# Altium PCB nguon.PcbDoc
Units mm, origin at the board's own origin, x right, y up, seen from the top; angles counter-clockwise.
Board outline 36.58 x 27.56 mm, 2 copper layers (Top Layer, Bottom Layer); 54 components, 5 nets, 132 pads, 24 vias.
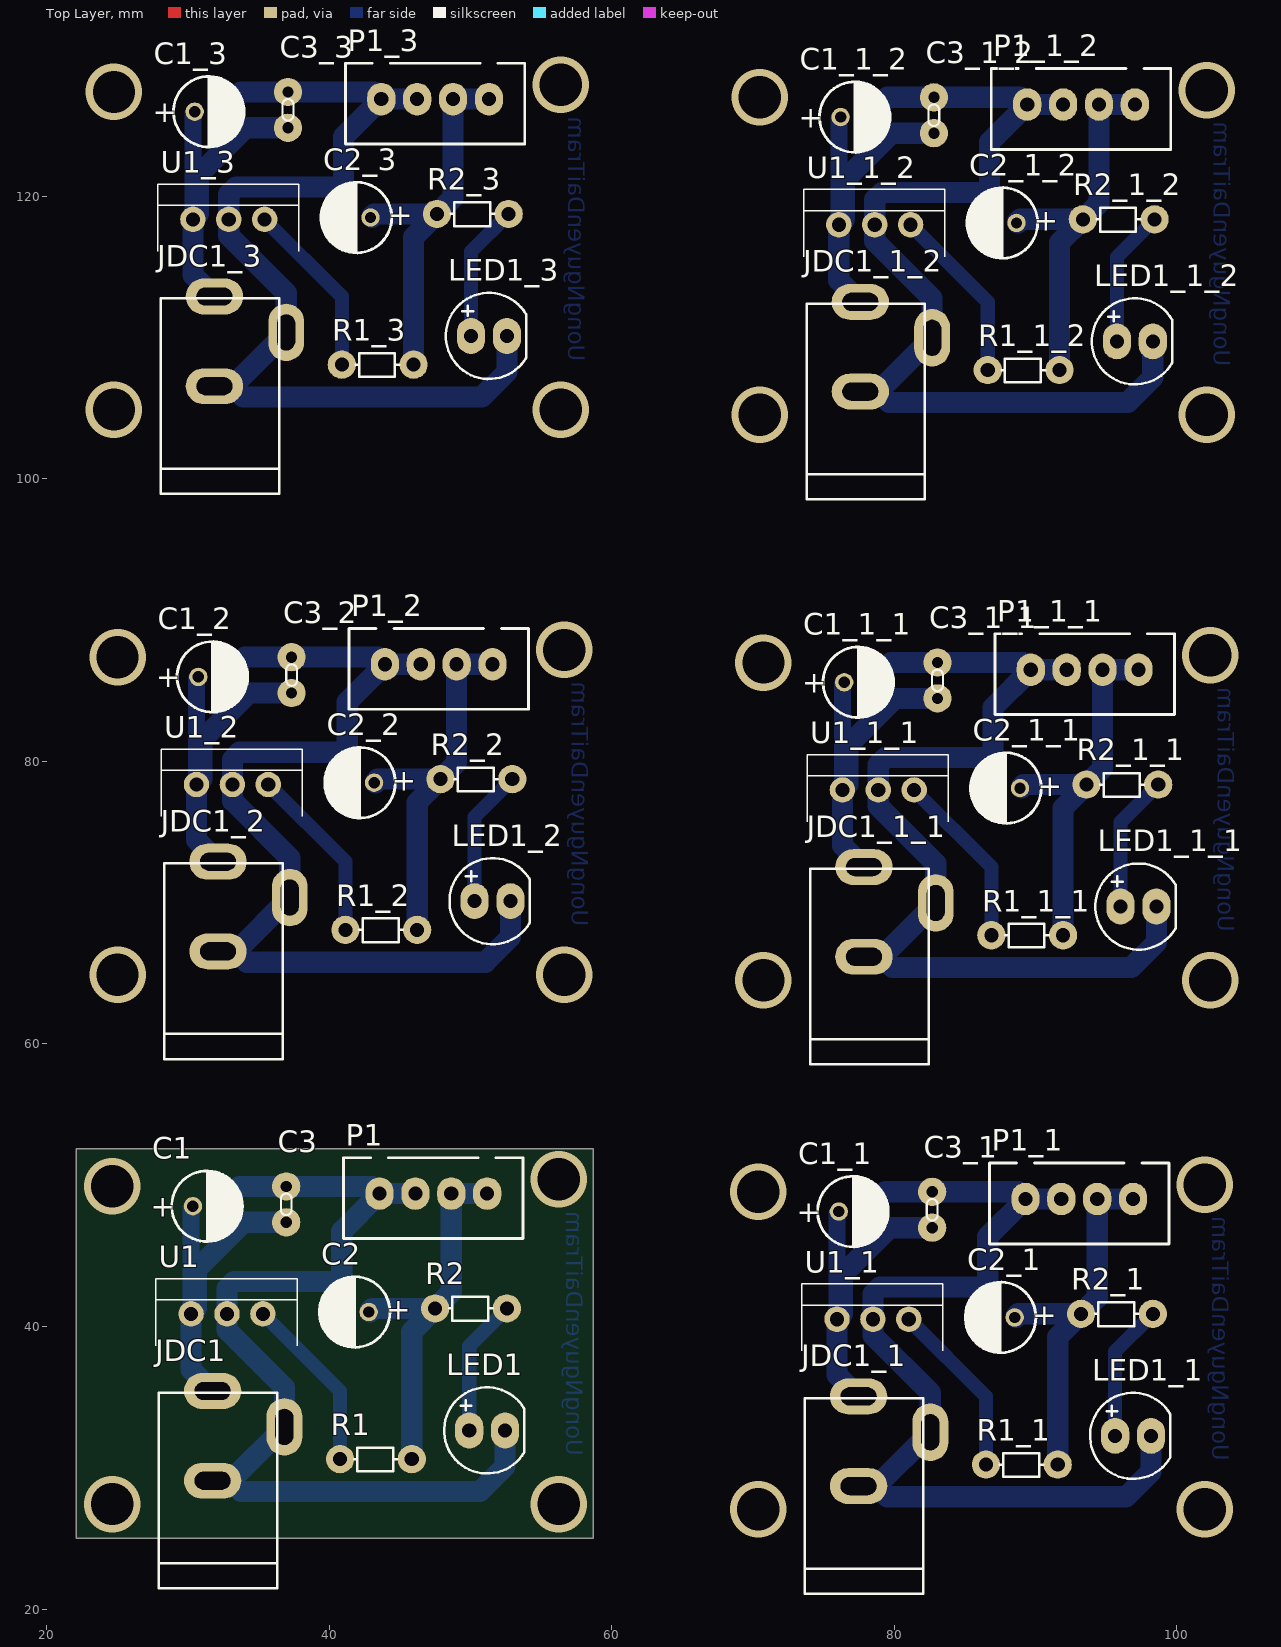
[diagram p0: Top Layer view]
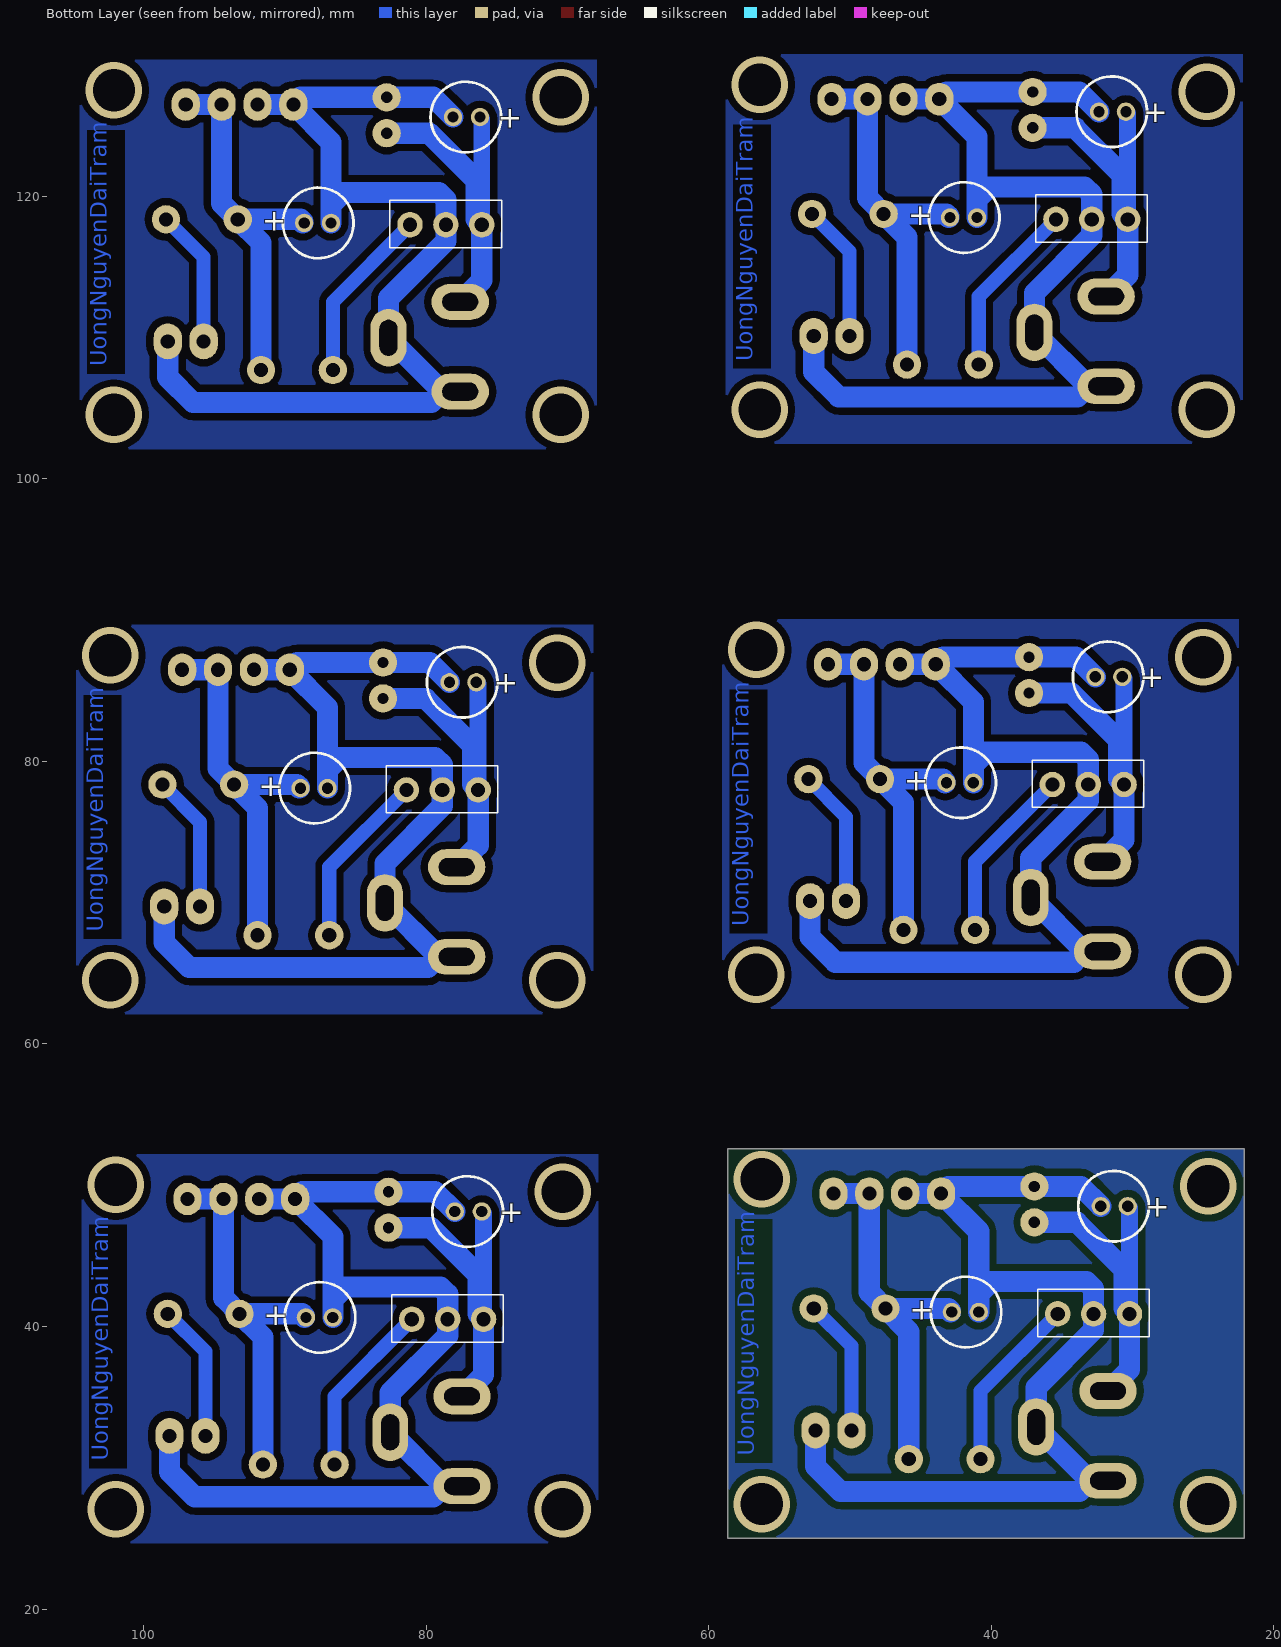
[diagram p1: Bottom Layer view, seen from below]

## Layer stack, top to bottom
Top Solder: solder mask 0.0102, Solder Resist, Dk 3.5
Top Layer: signal copper 0.0356
Dielectric 1: dielectric 0.32, FR-4, Dk 4.8
Bottom Layer: signal copper 0.0356
Bottom Solder: solder mask 0.0102, Solder Resist, Dk 3.5

## Board outline
22.098,25.019 22.098,52.578 58.674,52.578 58.674,25.019

## Design rules (kind name [scope] priority, off if disabled: settings)
Clearance [All] p1: gap=0.5 ignorepadtopadclearanceinfootprint=FALSE
PolygonConnect [All] p1: connectstyle=Relief reliefconductorwidth=0.254 reliefentries=4 polygonreliefangle="90 Angle" airgapwidth=0.254
RoutingVias [All] p1: holewidth=0.711 width=1.27 viastyle="Through Hole" minholewidth=0.711 minwidth=1.27 maxholewidth=0.711 maxwidth=1.27
SolderMaskExpansion [All] p1: expansion=0.102
Width [All] p1: maxlimit=1.5 minlimit=1 preferedwidth=1.2
30 further rules are at their usual default settings.

## Classes and differential pairs
component class nguon: C1 C2 C3 JDC1 LED1 P1 R1 R2 U1

## Components (designator, comment, footprint, x,y, rotation, side; value= is the part's Value field where it differs from the comment)
C1 "100uF" "RADIAL B" 30.353,48.514 r0 top
C1_1 "100uF" "RADIAL B" 76.073,48.133 r0 top (schematic designator C1)
C1_1_1 "100uF" "RADIAL B" 76.454,85.598 r0 top (schematic designator C1)
C1_1_2 "100uF" "RADIAL B" 76.2,125.603 r0 top (schematic designator C1)
C1_2 "100uF" "RADIAL B" 30.734,85.979 r0 top (schematic designator C1)
C1_3 "100uF" "RADIAL B" 30.48,125.984 r0 top (schematic designator C1)
C2 "100uF" "RADIAL B" 42.799,41.021 r180 top
C2_1 "100uF" "RADIAL B" 88.519,40.64 r180 top (schematic designator C2)
C2_1_1 "100uF" "RADIAL B" 88.9,78.105 r180 top (schematic designator C2)
C2_1_2 "100uF" "RADIAL B" 88.646,118.11 r180 top (schematic designator C2)
C2_2 "100uF" "RADIAL B" 43.18,78.486 r180 top (schematic designator C2)
C2_3 "100uF" "RADIAL B" 42.926,118.491 r180 top (schematic designator C2)
C3 "Capacitor Ceramic" Tu-pico 36.957,49.911 r270 top value=104
C3_1 "Capacitor Ceramic" Tu-pico 82.677,49.53 r270 top value=104 (schematic designator C3)
C3_1_1 "Capacitor Ceramic" Tu-pico 83.058,86.995 r270 top value=104 (schematic designator C3)
C3_1_2 "Capacitor Ceramic" Tu-pico 82.804,127 r270 top value=104 (schematic designator C3)
C3_2 "Capacitor Ceramic" Tu-pico 37.338,87.376 r270 top value=104 (schematic designator C3)
C3_3 "Capacitor Ceramic" Tu-pico 37.084,127.381 r270 top value=104 (schematic designator C3)
JDC1 "Jac DC" DC0 34.29,32.258 r90 top
JDC1_1 "Jac DC" DC0 80.01,31.877 r90 top (schematic designator JDC1)
JDC1_1_1 "Jac DC" DC0 80.391,69.342 r90 top (schematic designator JDC1)
JDC1_1_2 "Jac DC" DC0 80.137,109.347 r90 top (schematic designator JDC1)
JDC1_2 "Jac DC" DC0 34.671,69.723 r90 top (schematic designator JDC1)
JDC1_3 "Jac DC" DC0 34.417,109.728 r90 top (schematic designator JDC1)
LED1 "LED" LED-5-RED 49.911,32.639 r0 top value="LED 3 ly Single Colour"
LED1_1 "LED" LED-5-RED 95.631,32.258 r0 top value="LED 3 ly Single Colour" (schematic designator LED1)
LED1_1_1 "LED" LED-5-RED 96.012,69.723 r0 top value="LED 3 ly Single Colour" (schematic designator LED1)
LED1_1_2 "LED" LED-5-RED 95.758,109.728 r0 top value="LED 3 ly Single Colour" (schematic designator LED1)
LED1_2 "LED" LED-5-RED 50.292,70.104 r0 top value="LED 3 ly Single Colour" (schematic designator LED1)
LED1_3 "LED" LED-5-RED 50.038,110.109 r0 top value="LED 3 ly Single Colour" (schematic designator LED1)
P1 "Connector" JST-XH_B4B-XH-A 47.371,49.403 r180 top
P1_1 "Connector" JST-XH_B4B-XH-A 93.091,49.022 r180 top (schematic designator P1)
P1_1_1 "Connector" JST-XH_B4B-XH-A 93.472,86.487 r180 top (schematic designator P1)
P1_1_2 "Connector" JST-XH_B4B-XH-A 93.218,126.492 r180 top (schematic designator P1)
P1_2 "Connector" JST-XH_B4B-XH-A 47.752,86.868 r180 top (schematic designator P1)
P1_3 "Connector" JST-XH_B4B-XH-A 47.498,126.873 r180 top (schematic designator P1)
R1 "CT" R1/8W 43.307,30.607 r180 top value="R1/4W - 1K"
R1_1 "CT" R1/8W 89.027,30.226 r180 top value="R1/4W - 1K" (schematic designator R1)
R1_1_1 "CT" R1/8W 89.408,67.691 r180 top value="R1/4W - 1K" (schematic designator R1)
R1_1_2 "CT" R1/8W 89.154,107.696 r180 top value="R1/4W - 1K" (schematic designator R1)
R1_2 "CT" R1/8W 43.688,68.072 r180 top value="R1/4W - 1K" (schematic designator R1)
R1_3 "CT" R1/8W 43.434,108.077 r180 top value="R1/4W - 1K" (schematic designator R1)
R2 "220" R1/8W 50.038,41.275 r180 top value="R1/4W - 1K"
R2_1 "220" R1/8W 95.758,40.894 r180 top value="R1/4W - 1K" (schematic designator R2)
R2_1_1 "220" R1/8W 96.139,78.359 r180 top value="R1/4W - 1K" (schematic designator R2)
R2_1_2 "220" R1/8W 95.885,118.364 r180 top value="R1/4W - 1K" (schematic designator R2)
R2_2 "220" R1/8W 50.419,78.74 r180 top value="R1/4W - 1K" (schematic designator R2)
R2_3 "220" R1/8W 50.165,118.745 r180 top value="R1/4W - 1K" (schematic designator R2)
U1 "LM78xx" TO-220 30.226,40.894 r270 top value=LM7805CT
U1_1 "LM78xx" TO-220 75.946,40.513 r270 top value=LM7805CT (schematic designator U1)
U1_1_1 "LM78xx" TO-220 76.327,77.978 r270 top value=LM7805CT (schematic designator U1)
U1_1_2 "LM78xx" TO-220 76.073,117.983 r270 top value=LM7805CT (schematic designator U1)
U1_2 "LM78xx" TO-220 30.607,78.359 r270 top value=LM7805CT (schematic designator U1)
U1_3 "LM78xx" TO-220 30.353,118.364 r270 top value=LM7805CT (schematic designator U1)

## Footprints (in the part's own frame and the unit in brackets; to place one, negate y for a bottom-side part, rotate by r counter-clockwise, add the part's x,y. Pads: shape width x height; smd on the part's side, far side on the other; paste and mask are expansions set on the pad)
DC0 [mil] "Jac DC input"
  oval 100x160 hole 50 slot 100 at 90 deg: 1(125,100) 2(-125,100)
  oval 160x100 hole 50 slot 100 at 0 deg: 3(25,-100)
  silkscreen extent -425,-80 120,250, body extent -410,-105 134,269, height 434
JST-XH_B4B-XH-A [mm] "JST; XH series; 4 circuit; 2.54 Pitch; Through-hole type; Top entry"
  oval 2x2.3 hole 1: 1(-3.81,0) 2(-1.27,0) 3(1.27,0) 4(3.81,0)
  silkscreen extent -6.35,-2.54 6.35,3.18, body extent -6.2,-2.57 6.2,3.18, height 7
LED-5-RED [mm] "LED 2 PIN, 5 ly , Only colour,pin to pin 100mil"
  oval 2x2.54 hole 1: 1(0,0) 2(2.54,0)
  silkscreen extent -1.77,-3.05 3.91,3.04, body extent -1.64,-3.02 3.78,3, height 8.62
R1/8W [mm] "R 1/8W, 2 pin, 300mil"
  round 2 hole 1: 1(-2.54,0) 2(2.54,0)
  silkscreen extent -1.52,-0.81 1.55,0.86, body extent -3.43,-0.9 3.43,0.94, height 2.19
"RADIAL B" [mm] "Capacitor, Electrolytic, Radial; Body 5 x 6.8 mm (Dia.xH typ); Pin Spacing 2 mm (typ)"
  round 1.3 hole 0.8: 1(0,0) 2(1.905,0)
  silkscreen extent -1.5,-2.5 3.5,2.51, body extent -1.48,-2.49 3.52,2.51, height 11
TO-220 [mm]
  round 1.8 hole 1: 1(0,0) 2(0,2.54) 3(0,5.08)
  silkscreen extent -2.5,-2.5 2.25,7.5, body extent -2.4,-2.45 2.1,7.45, height 19.7
Tu-pico [mm] "Tu gom mini"
  round 2 hole 0.8: 1(0,0) 2(2.54,0)
  silkscreen extent 0.51,-0.38 2.03,0.38, body extent -1.65,-0.85 4.19,0.85, height 6.12

## Part data
C1 C1_1 C1_1_1 C1_1_2 C1_2 C1_3 C2 C2_1 C2_1_1 C2_1_2 C2_2 C2_3: library part Cap_Pol, "Polarized Capacitor", Capacitor Type=Tant, Manufacturer=FARNELL, Volt=25V, AEMS Code=2100110, ComponentLink1Description="Digikey Part Link", ComponentLink2Description="Open Datasheet", ComponentLink2URL=H:\LIBRARY\LIBRARY.Datasheet\, Published=13-April-2009, Publisher="Hoang Nguyen", Vendor=Digikey
C3 C3_1 C3_1_1 C3_1_2 C3_2 C3_3: library part CapCeramic, "Capacitor", LatestRevisionDate=17-Jul-2002, LatestRevisionNote="Re-released for DXP Platform.", PackageReference=RAD-0.3, Published=8-Jun-2000, Publisher="Altium Limited"
JDC1 JDC1_1 JDC1_1_1 JDC1_1_2 JDC1_2 JDC1_3: library part DCIN, "Jac DC input"
LED1 LED1_1 LED1_1_1 LED1_1_2 LED1_2 LED1_3: "LED Single colour Green and Red"
P1 P1_1 P1_1_1 P1_1_2 P1_2 P1_3: library part Connector_4pin
R1 R1_1 R1_1_1 R1_1_2 R1_2 R1_3 R2 R2_1 R2_1_1 R2_1_2 R2_2 R2_3: library part R, "Resistor 1/4W"
U1 U1_1 U1_1_1 U1_1_2 U1_2 U1_3: library part 78xx, "Regulator", Manufacturer="Fairchild Semiconductor Corporation", Output Current="Up to 1A", PSpiceTemplate="X^@REFDES %IN %OUT %GND @MODEL", Tolerance="4 %", ComponentLink1Description="Digikey Part Link", ComponentLink2Description="Open Datasheet", ComponentLink2URL=H:\LIBRARY\LIBRARY.Datasheet\LM7805.pdf, Price="2500 VND", Published=13-April-2009, Publisher="Hoang Nguyen", Vendor=Digikey, V out=5V

## Via types
v1: diameter 4, hole 3, Top Layer to Bottom Layer, 24 vias

## Nets (pads, with @x,y where several pads share a name; then routed paths per layer and width w, separated by ;. In a path a pad name is that pad's centre, name@x,y a point inside that pad or via, vN(x,y) a via of type N, cw(c..) or ccw(c..) an arc to the next point about the centre after c; other vN are vias at no path point)
5V: C2.1 P1.1 P1.2 R1.1 R2.2 | length 27.3
  Bottom Layer w1.5: C2.1@42.894,41.021 42.894,41.116 43.053,41.275 R2.2 ; R1.1 45.847,39.624 R2.2 ; P1.1 P1.2 48.641,42.418 R2.2
12V: C1.1 C3.2 JDC1.1 U1.1 | length 24.8
  Bottom Layer w1.2: U1.1 30.226,48.387 C1.1
  Bottom Layer w1.5: JDC1.1 30.226,36.957 U1.1 30.616,41.284 30.616,44.044 33.943,47.371 C3.2
GND: C1.2 C2.2 C3.1 JDC1.2 JDC1.3 LED1.2 P1.3 P1.4 U1.2 | length 74
  Bottom Layer w1.5: JDC1.2 JDC1.2@33.02,29.083 ; C1.2 33.655,49.911 C3.1 43.053,49.911 P1.4 ; C2.2 40.894,42.291 ; P1.3 P1.4 ; LED1.2 52.451,30.099 50.673,28.321 33.782,28.321 JDC1.2@33.02,29.083 ; JDC1.2@33.02,29.083 JDC1.3 36.83,35.687 32.766,39.751 U1.2 32.766,42.672 33.274,43.18 40.005,43.18 40.894,42.291 ; 40.894,42.291 40.894,46.736 P1.4
NetLED1_1: LED1.1 R2.1 | length 9.7
  Bottom Layer w1: LED1.1 49.911,38.608 R2.1
NetR1_2: R1.2 U1.3 | length 12.5
  Bottom Layer w1: U1.3 40.767,35.433 R1.2
pads on no net: C1_1.1 C1_1.2 C1_1_1.1 C1_1_1.2 C1_1_2.1 C1_1_2.2 C1_2.1 C1_2.2 C1_3.1 C1_3.2 C2_1.1 C2_1.2 C2_1_1.1 C2_1_1.2 C2_1_2.1 C2_1_2.2 C2_2.1 C2_2.2 C2_3.1 C2_3.2 C3_1.1 C3_1.2 C3_1_1.1 C3_1_1.2 C3_1_2.1 C3_1_2.2 C3_2.1 C3_2.2 C3_3.1 C3_3.2 JDC1_1.1 JDC1_1.2 JDC1_1.3 JDC1_1_1.1 JDC1_1_1.2 JDC1_1_1.3 JDC1_1_2.1 JDC1_1_2.2 JDC1_1_2.3 JDC1_2.1 JDC1_2.2 JDC1_2.3 JDC1_3.1 JDC1_3.2 JDC1_3.3 LED1_1.1 LED1_1.2 LED1_1_1.1 LED1_1_1.2 LED1_1_2.1 LED1_1_2.2 LED1_2.1 LED1_2.2 LED1_3.1 LED1_3.2 P1_1.1 P1_1.2 P1_1.3 P1_1.4 P1_1_1.1 P1_1_1.2 P1_1_1.3 P1_1_1.4 P1_1_2.1 P1_1_2.2 P1_1_2.3 P1_1_2.4 P1_2.1 P1_2.2 P1_2.3 P1_2.4 P1_3.1 P1_3.2 P1_3.3 P1_3.4 R1_1.1 R1_1.2 R1_1_1.1 R1_1_1.2 R1_1_2.1 R1_1_2.2 R1_2.1 R1_2.2 R1_3.1 R1_3.2 R2_1.1 R2_1.2 R2_1_1.1 R2_1_1.2 R2_1_2.1 R2_1_2.2 R2_2.1 R2_2.2 R2_3.1 R2_3.2 U1_1.1 U1_1.2 U1_1.3 U1_1_1.1 U1_1_1.2 U1_1_1.3 U1_1_2.1 U1_1_2.2 U1_1_2.3 U1_2.1 U1_2.2 U1_2.3 U1_3.1 U1_3.2 U1_3.3
copper on no net: | length 741.6
  Bottom Layer w1: 35.433,118.364 40.894,112.903 40.894,108.077 ; 35.687,78.359 41.148,72.898 41.148,68.072 ; 50.038,110.109 50.038,116.078 52.705,118.745 ; 50.292,70.104 50.292,76.073 52.959,78.74 ; 81.026,40.513 86.487,35.052 86.487,30.226 ; 81.153,117.983 86.614,112.522 86.614,107.696 ; 81.407,77.978 86.868,72.517 86.868,67.691 ; 95.631,32.258 95.631,38.227 98.298,40.894 ; 95.758,109.728 95.758,115.697 98.425,118.364 ; 96.012,69.723 96.012,75.692 98.679,78.359
  Bottom Layer w1.2: 30.353,118.364 30.353,125.857 30.48,125.984 ; 30.607,78.359 30.607,85.852 30.734,85.979 ; 75.946,40.513 75.946,48.006 76.073,48.133 ; 76.073,117.983 76.073,125.476 76.2,125.603 ; 76.327,77.978 76.327,85.471 76.454,85.598
  Bottom Layer w1.5: 31.877,106.553 33.147,106.553 ; 31.877,112.903 30.353,114.427 30.353,118.364 30.743,118.754 30.743,121.514 34.07,124.841 37.084,124.841 ; 32.131,66.548 33.401,66.548 ; 32.131,72.898 30.607,74.422 30.607,78.359 30.997,78.749 30.997,81.509 34.324,84.836 37.338,84.836 ; 32.385,125.984 33.782,127.381 37.084,127.381 43.18,127.381 43.688,126.873 ; 32.639,85.979 34.036,87.376 37.338,87.376 43.434,87.376 43.942,86.868 ; 41.021,118.491 41.021,119.761 ; 41.275,78.486 41.275,79.756 ; 43.021,118.491 43.021,118.586 43.18,118.745 47.625,118.745 ; 43.275,78.486 43.275,78.581 43.434,78.74 47.879,78.74 ; 45.974,108.077 45.974,117.094 47.625,118.745 ; 46.228,68.072 46.228,77.089 47.879,78.74 ; 46.228,126.873 43.688,126.873 ; 46.482,86.868 43.942,86.868 ; 51.308,126.873 48.768,126.873 48.768,119.888 47.625,118.745 ; 51.562,86.868 49.022,86.868 49.022,79.883 47.879,78.74 ; 52.578,110.109 52.578,107.569 50.8,105.791 33.909,105.791 33.147,106.553 ; 52.832,70.104 52.832,67.564 51.054,65.786 34.163,65.786 33.401,66.548 ; 77.47,28.702 78.74,28.702 ; 77.47,35.052 75.946,36.576 75.946,40.513 76.336,40.903 76.336,43.663 79.663,46.99 82.677,46.99 ; 77.597,106.172 78.867,106.172 ; 77.597,112.522 76.073,114.046 76.073,117.983 76.463,118.373 76.463,121.133 79.79,124.46 82.804,124.46 ; 77.851,66.167 79.121,66.167 ; 77.851,72.517 76.327,74.041 76.327,77.978 76.717,78.368 76.717,81.128 80.044,84.455 83.058,84.455 ; 77.978,48.133 79.375,49.53 82.677,49.53 88.773,49.53 89.281,49.022 ; 78.105,125.603 79.502,127 82.804,127 88.9,127 89.408,126.492 ; 78.359,85.598 79.756,86.995 83.058,86.995 89.154,86.995 89.662,86.487 ; 86.614,40.64 86.614,41.91 ; 86.741,118.11 86.741,119.38 ; 86.995,78.105 86.995,79.375 ; 88.614,40.64 88.614,40.735 88.773,40.894 93.218,40.894 ; 88.741,118.11 88.741,118.205 88.9,118.364 93.345,118.364 ; 88.995,78.105 88.995,78.2 89.154,78.359 93.599,78.359 ; 91.567,30.226 91.567,39.243 93.218,40.894 ; 91.694,107.696 91.694,116.713 93.345,118.364 ; 91.821,49.022 89.281,49.022 ; 91.948,67.691 91.948,76.708 93.599,78.359 ; 91.948,126.492 89.408,126.492 ; 92.202,86.487 89.662,86.487 ; 96.901,49.022 94.361,49.022 94.361,42.037 93.218,40.894 ; 97.028,126.492 94.488,126.492 94.488,119.507 93.345,118.364 ; 97.282,86.487 94.742,86.487 94.742,79.502 93.599,78.359 ; 98.171,32.258 98.171,29.718 96.393,27.94 79.502,27.94 78.74,28.702 ; 98.298,109.728 98.298,107.188 96.52,105.41 79.629,105.41 78.867,106.172 ; 98.552,69.723 98.552,67.183 96.774,65.405 79.883,65.405 79.121,66.167 ; 33.147,106.553 36.957,110.363 36.957,113.157 32.893,117.221 32.893,118.364 32.893,120.142 33.401,120.65 40.132,120.65 41.021,119.761 ; 33.401,66.548 37.211,70.358 37.211,73.152 33.147,77.216 33.147,78.359 33.147,80.137 33.655,80.645 40.386,80.645 41.275,79.756 ; 41.021,119.761 41.021,124.206 43.688,126.873 ; 41.275,79.756 41.275,84.201 43.942,86.868 ; 78.74,28.702 82.55,32.512 82.55,35.306 78.486,39.37 78.486,40.513 78.486,42.291 78.994,42.799 85.725,42.799 86.614,41.91 ; 78.867,106.172 82.677,109.982 82.677,112.776 78.613,116.84 78.613,117.983 78.613,119.761 79.121,120.269 85.852,120.269 86.741,119.38 ; 79.121,66.167 82.931,69.977 82.931,72.771 78.867,76.835 78.867,77.978 78.867,79.756 79.375,80.264 86.106,80.264 86.995,79.375 ; 86.614,41.91 86.614,46.355 89.281,49.022 ; 86.741,119.38 86.741,123.825 89.408,126.492 ; 86.995,79.375 86.995,83.82 89.662,86.487
  other v1: 70.358,27.051 101.981,27.051 24.638,27.432 56.261,27.432 70.358,49.53 24.638,49.911 101.981,50.038 56.261,50.419 70.739,64.516 102.362,64.516 25.019,64.897 56.642,64.897 70.739,86.995 25.019,87.376 102.362,87.503 56.642,87.884 70.485,104.521 102.108,104.521 24.765,104.902 56.388,104.902 70.485,127 24.765,127.381 102.108,127.508 56.388,127.889

## Polygon pours and split planes (outlines as drawn)
no net on Bottom Layer (solid, pour order 14): 22.225,102.489 22.225,130.048 58.801,130.048 58.801,102.489
no net on Bottom Layer (solid, pour order 12): 67.945,102.108 67.945,129.667 104.521,129.667 104.521,102.108
no net on Bottom Layer (solid, pour order 10): 22.479,62.484 22.479,90.043 59.055,90.043 59.055,62.484
no net on Bottom Layer (solid, pour order 8): 68.199,62.103 68.199,89.662 104.775,89.662 104.775,62.103
no net on Bottom Layer (solid, pour order 6): 67.818,24.638 67.818,52.197 104.394,52.197 104.394,24.638
no net on Bottom Layer (solid, pour order 4): 22.098,25.019 22.098,52.578 58.674,52.578 58.674,25.019

## Other copper
Bottom Layer:
  text "UongNguyenDaiTram" at 56.515,108.331 h2 r270
  text "UongNguyenDaiTram" at 102.235,107.95 h2 r270
  text "UongNguyenDaiTram" at 56.769,68.326 h2 r270
  text "UongNguyenDaiTram" at 102.489,67.945 h2 r270
  text "UongNguyenDaiTram" at 56.388,30.861 h2 r270
  text "UongNguyenDaiTram" at 102.108,30.48 h2 r270

## Silkscreen, mask and mechanical layers (free items; w line width, h text height)
Drill Drawing:
  lines w0.254: 22.098,25.019 58.674,25.019 58.674,52.578 22.098,52.578 22.098,25.019 ; 22.225,102.489 22.225,130.048 58.801,130.048 58.801,102.489 22.225,102.489 ; 22.479,62.484 22.479,90.043 59.055,90.043 59.055,62.484 22.479,62.484 ; 67.818,24.638 67.818,52.197 104.394,52.197 104.394,24.638 67.818,24.638 ; 67.945,102.108 104.521,102.108 104.521,129.667 67.945,129.667 67.945,102.108 ; 68.199,62.103 104.775,62.103 104.775,89.662 68.199,89.662 68.199,62.103

## Text inside footprints (layer, text, board x,y; h text height)
C1: Top Overlay "+" at 27.378,47.764 h1.5; Bottom Overlay "+" at 27.378,47.764 h1.5
C1_1: Top Overlay "+" at 73.098,47.383 h1.5; Bottom Overlay "+" at 73.098,47.383 h1.5
C1_1_1: Top Overlay "+" at 73.479,84.848 h1.5; Bottom Overlay "+" at 73.479,84.848 h1.5
C1_1_2: Top Overlay "+" at 73.225,124.853 h1.5; Bottom Overlay "+" at 73.225,124.853 h1.5
C1_2: Top Overlay "+" at 27.759,85.229 h1.5; Bottom Overlay "+" at 27.759,85.229 h1.5
C1_3: Top Overlay "+" at 27.505,125.234 h1.5; Bottom Overlay "+" at 27.505,125.234 h1.5
C2: Top Overlay "+" at 45.774,41.771 h1.5 r180; Bottom Overlay "+" at 45.774,41.771 h1.5 r180
C2_1: Top Overlay "+" at 91.494,41.39 h1.5 r180; Bottom Overlay "+" at 91.494,41.39 h1.5 r180
C2_1_1: Top Overlay "+" at 91.875,78.855 h1.5 r180; Bottom Overlay "+" at 91.875,78.855 h1.5 r180
C2_1_2: Top Overlay "+" at 91.621,118.86 h1.5 r180; Bottom Overlay "+" at 91.621,118.86 h1.5 r180
C2_2: Top Overlay "+" at 46.155,79.236 h1.5 r180; Bottom Overlay "+" at 46.155,79.236 h1.5 r180
C2_3: Top Overlay "+" at 45.901,119.241 h1.5 r180; Bottom Overlay "+" at 45.901,119.241 h1.5 r180